# EAGLE board final - test (EAGLE 9.4.2)
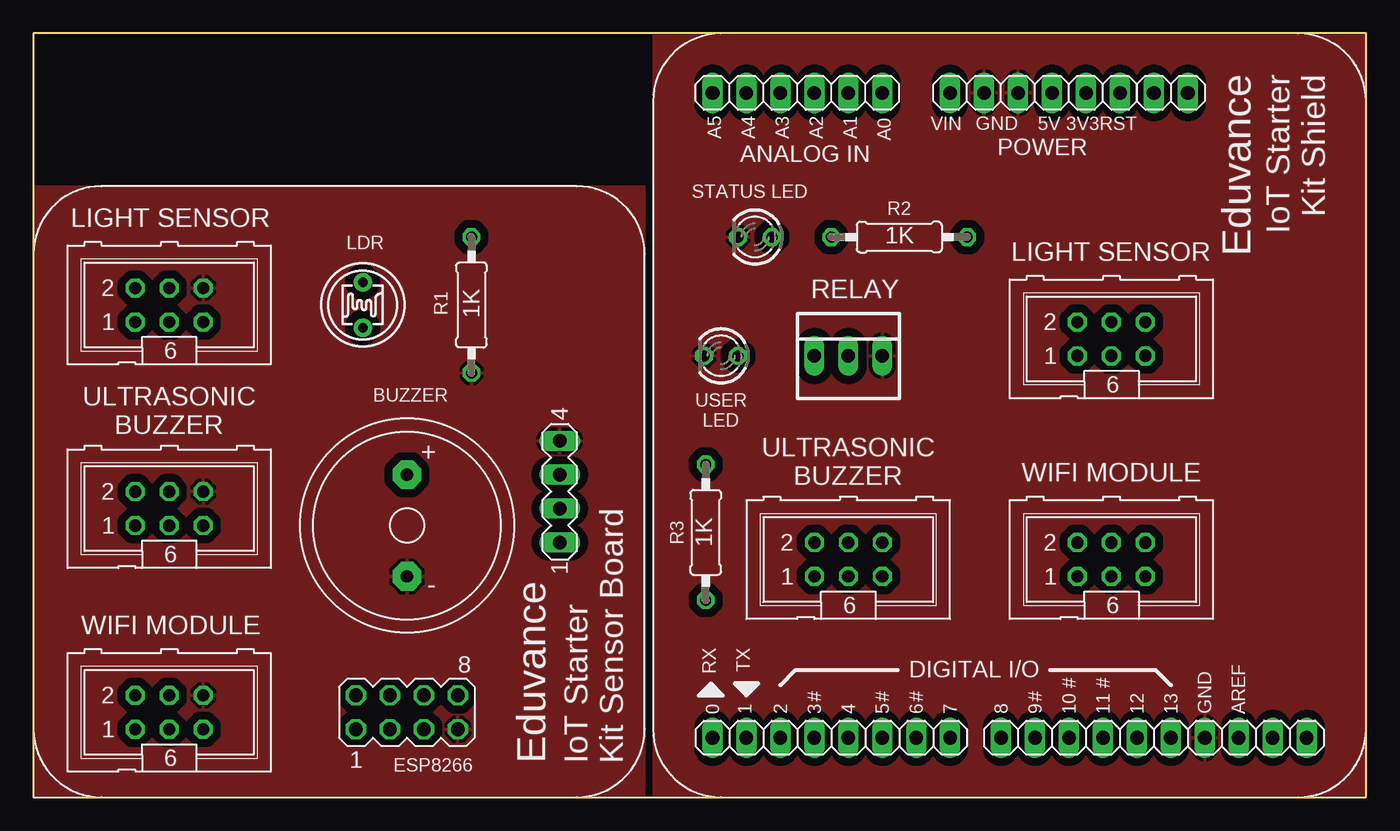
[diagram p0: board, top side]
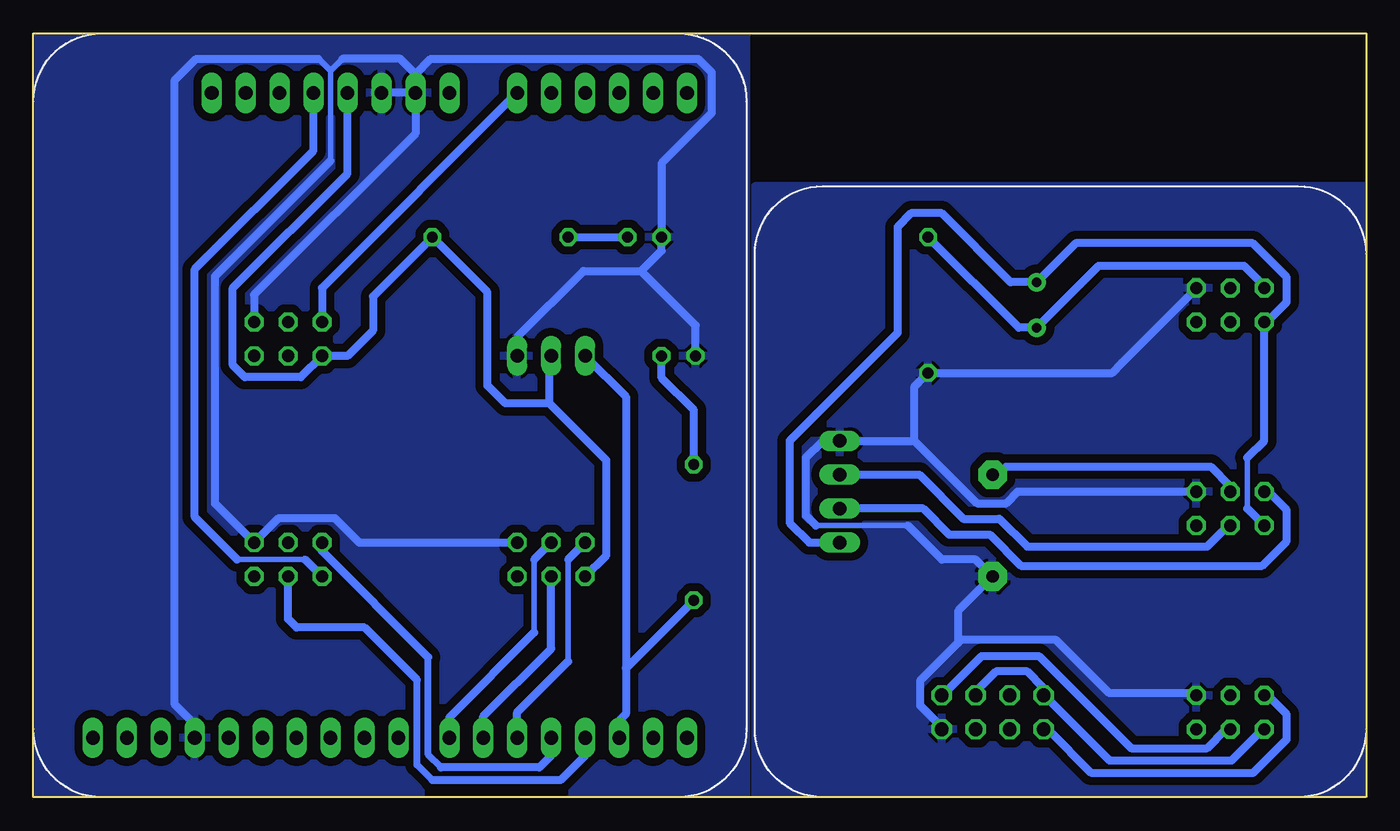
[diagram p1: board, bottom side, seen from below]

Size 99.69 x 57.15 mm. Coordinates in mm from the lower left corner, seen from the top.
Outline: 0,0 99.69,0 99.69,57.15 0,57.15 0,0
Copper layers (1*16): Top 0.035mm / dielectric 1.5mm / Bottom 0.035mm
Design rules "default *": minimum track width 20mil, minimum drill 0.35mm, track to track 24mil, track to pad 24mil, pad to pad 24mil, via to via 24mil, smd to smd 24mil, copper to edge 1mil, drill to drill 6mil, minimum pad ring 10mil, minimum via ring 8mil, stop-mask expansion 4mil, vias tented up to drill 0mil, thermal gap 10mil
tKeepout: area 0,0 to 45.7,45.7; area 46.4,0 to 99.7,57.1

## Footprints (pad centres in the part's own frame; a part is rotated, then mirrored left to right if it is on the bottom)
1X02 = drill 1.016 long: 1 -1.27,0; 2 1.27,0
1X06 = drill 1.016 long: 1 -6.35,0; 2 -3.81,0; 3 -1.27,0; 4 1.27,0; 5 3.81,0; 6 6.35,0
F/QMB = drill 0.914 pad 2.159 octagon: + 3.81,0; - -3.81,0
MA04-2 = drill 1.016 octagon: 1 -3.81,-1.27; 2 -3.81,1.27; 3 -1.27,-1.27; 4 -1.27,1.27; 5 1.27,-1.27; 6 1.27,1.27; 7 3.81,-1.27; 8 3.81,1.27
1X08 = drill 1.016 long: 1 -8.89,0; 2 -6.35,0; 3 -3.81,0; 4 -1.27,0; 5 1.27,0; 6 3.81,0; 7 6.35,0; 8 8.89,0
T0-46-A10XX = drill 0.7 pad 1.4: 1 -1.7,0; 2 1.7,0
LED3MM = drill 0.813 octagon: A -1.27,0; K 1.27,0
ML6 = drill 0.914 octagon: 1 -2.54,-1.27; 2 -2.54,1.27; 3 0,-1.27; 4 0,1.27; 5 2.54,-1.27; 6 2.54,1.27
0207/10 = drill 0.813 octagon: 1 -5.08,0; 2 5.08,0
22-23-2031 = drill 1 long: 1 -2.54,0; 2 0,0; 3 2.54,0
MA04-1 = drill 1.016 long: 1 -3.81,0; 2 -1.27,0; 3 1.27,0; 4 3.81,0

## Placement (x,y rotation side)
_  [1X02]  93.98,4.45 0 top
__  [1X02]  85.09,52.7 0 top
AD  [1X06]  57.15,52.7 180 top
BUZZER  BUZZER  [F/QMB]  27.94,20.32 90 top
ESP8266  [MA04-2]  27.94,6.35 0 top
IOH  [1X08]  81.28,4.45 0 top
IOL  [1X08]  59.69,4.45 0 top
LDR  [T0-46-A10XX]  24.64,36.83 270 top
LED  USER LED  [LED3MM]  51.44,33.02 180 top
LIGHT_SENSOR  LIGHT SENSOR  [ML6]  10.16,36.83 0 top
LIGHT_SENSOR2  LIGHT SENSOR  [ML6]  80.64,34.29 0 top
POWER  [1X06]  74.93,52.7 180 top
R1  1K  [0207/10]  32.77,36.83 90 top
R2  1K  [0207/10]  64.77,41.91 180 top
R3  1K  [0207/10]  50.29,19.81 270 top
RELAY  22-23-2031  [22-23-2031]  60.96,33.02 0 top
STATUS_LED  STATUS LED  [LED3MM]  53.98,41.91 180 top
ULTRASONIC_BUZZER  ULTRASONIC BUZZER  [ML6]  10.16,21.59 0 top
ULTRASONIC_BUZZER2  ULTRASONIC BUZZER  [ML6]  60.96,17.78 0 top
ULTRASONIC_SENSOR  ULTRASONIC SENSOR  [MA04-1]  39.37,22.86 90 top
WIFI_MODULE  WIFI MODULE  [ML6]  10.16,6.35 0 top
WIFI_MODULE2  WIFI MODULE  [ML6]  80.64,17.78 0 top

## Library data of the parts
_ __ AD IOH IOL POWER = pinhead
BUZZER = buzzer; OC_FARNELL: unknown; OC_NEWARK: unknown
ESP8266 ULTRASONIC_SENSOR = con-lstb; OC_FARNELL: unknown; OC_NEWARK: unknown
LDR = photo-elements
LED STATUS_LED = led
LIGHT_SENSOR LIGHT_SENSOR2 ULTRASONIC_BUZZER ULTRASONIC_BUZZER2 WIFI_MODULE WIFI_MODULE2 = con-harting-ml; OC_FARNELL: unknown; OC_NEWARK: unknown
R1-R3 = rcl; SPICEPREFIX: R
RELAY = con-molex; MF: MOLEX; MPN: 22-23-2031; OC_FARNELL: 1462950; OC_NEWARK: 30C0862

## Nets
3V3: ESP8266.2 ESP8266.6 WIFI_MODULE.1
5V: LDR.1 LIGHT_SENSOR.1 ULTRASONIC_BUZZER.1 ULTRASONIC_SENSOR.1
BUZ: BUZZER.+ ULTRASONIC_BUZZER.4
ECHO: ULTRASONIC_BUZZER.3 ULTRASONIC_SENSOR.3
GND: BUZZER.- ESP8266.7 LIGHT_SENSOR.6 R1.1 ULTRASONIC_BUZZER.6 ULTRASONIC_SENSOR.4 WIFI_MODULE.6
GND2: IOH.7 LED.K POWER.4 POWER.5 RELAY.3 STATUS_LED.K
N$1: POWER.3 RELAY.2
N$3: AD.1
N$4: IOL.6
N$5: IOL.7
N$6: IOL.8
N$7: POWER.2
N$8: IOL.4
N$9: IOL.5
N$10: STATUS_LED.A
N$11: IOL.3 R3.2 RELAY.1
RX: ESP8266.1 WIFI_MODULE.2
S$1: LED.A R3.1
SG: LDR.2 LIGHT_SENSOR.2 R1.2
TRIG: ULTRASONIC_BUZZER.2 ULTRASONIC_SENSOR.2
TX: ESP8266.8 WIFI_MODULE.3

## Tracks (layer width: path | path; a pad name or v marks a point on that pad's centre or on a via)
3V3
  Bottom 0.61: WIFI_MODULE.1 7.77,5.03 10.06,2.74 19.2,2.74 23.77,7.32 ESP8266.2 24.13,8.18 25.35,9.4 27.69,9.4 29.21,7.87 ESP8266.6
5V
  Bottom 0.406: 8.89,21.59 8.89,25.4
  Bottom 0.61: ULTRASONIC_SENSOR.1 41.66,19.05 43.13,20.52 43.13,26.67 35.05,34.75 35.05,42.67 34.04,43.69 31.75,43.69 26.59,38.53 LDR.1 21.71,41.45 8.48,41.45 5.94,38.91 5.94,37.03 7.32,35.66 LIGHT_SENSOR.1 7.62,26.67 8.89,25.4 | ULTRASONIC_BUZZER.1 8.89,21.59
BUZ
  Bottom 0.61: ULTRASONIC_BUZZER.4 10.16,23.27 11.63,24.74 26.92,24.74 27.53,24.13 BUZZER.+
ECHO
  Bottom 0.61: ULTRASONIC_BUZZER.3 10.52,20.12 11.89,18.75 25.35,18.75 27.43,20.83 30.12,20.83 33.43,24.13 ULTRASONIC_SENSOR.3
GND
  Bottom 0.406: 34.29,20.32 41.17,20.32
  Bottom 0.61: WIFI_MODULE.6 12.8,7.77 19.2,7.77 23.19,11.76 30.3,11.76 30.48,11.58 | ESP8266.7 32,5.49 33.38,6.86 33.38,8.69 30.56,11.51 30.48,11.58 | 18.26,32.49 12.8,37.95 LIGHT_SENSOR.6 | ULTRASONIC_BUZZER.6 26.06,22.86 26.92,22 29.11,22 33.78,26.67 | 34.29,20.32 31.75,17.78 29.21,17.78 BUZZER.- 30.48,13.97 30.48,11.58 | 41.17,20.32 41.91,21.06 41.91,25.4 40.64,26.67 ULTRASONIC_SENSOR.4 33.78,26.67 | 18.29,32.51 18.26,32.49 | 18.26,32.49 19,31.75 R1.1 33.78,30.73 33.78,26.67
  pour Bottom: 0,45.72 45.72,45.72 45.72,0 0,0
  pour Top: 0,45.72 45.72,45.72 45.72,0 0,0
GND2
  Bottom 0.406: 77.47,54.36 78.36,55.24 | 77.47,47.62 77.47,54.36 | 76.58,55.24 77.47,54.36
  Bottom 0.61: 63.5,19.05 75.31,19.05 77.15,20.89 81.34,20.89 83.19,19.05 86.11,21.97 86.11,38.99 77.47,47.62 | 83.19,35.56 83.19,37.59 71.12,49.66 POWER.5 | POWER.5 71.12,53.02 | 78.36,55.24 87.5,55.24 89.15,53.59 89.15,6.99 87.63,5.46 IOH.7 | POWER.5 POWER.4 | 71.12,54.1 69.98,55.24 49.97,55.24 48.96,54.23 48.96,51.18 52.7,47.43 STATUS_LED.K 52.7,40.89 54.23,39.37 | POWER.5 71.12,54.1 | 71.12,54.1 72.26,55.24 76.58,55.24 | RELAY.3 63.5,34.42 58.55,39.37 54.23,39.37 | LED.K 50.16,35.31 54.23,39.37
  pour Bottom: 46.35,57.15 99.69,57.15 99.69,0 46.35,0
  pour Top: 46.35,57.15 46.35,0 99.69,0 99.69,57.15
N$1
  Bottom 0.61: POWER.3 76.2,46.67 84.77,38.1 84.77,32.32 83.88,31.43 79.69,31.43 78.11,33.02 76.2,33.02 74.3,34.92 74.3,37.47 69.85,41.91 65.72,37.78 65.72,30.8 64.39,29.46 61.09,29.46 | 58.42,16.51 56.83,18.1 56.83,25.21 61.09,29.46 | 61.09,29.46 61.09,32.89 RELAY.2
N$3
  Bottom 0.61: 78.11,35.56 78.11,38.1 AD.1
N$4
  Bottom 0.406: 59.69,10.16 59.69,17.78
  Bottom 0.61: IOL.6 63.5,6.35 59.69,10.16 | 59.69,17.78 58.42,19.05
N$5
  Bottom 0.61: 60.96,16.51 60.96,11.11 66.04,6.03 IOL.7
N$6
  Bottom 0.406: 62.23,17.78 62.23,12.32
  Bottom 0.61: 60.96,19.05 62.23,17.78 | 62.23,12.32 68.58,5.97 IOL.8
N$7
  Bottom 0.406: 79.38,17.78 84.45,17.78
  Bottom 0.61: 78.11,16.51 79.38,17.78 | 84.45,17.78 87.63,20.95 87.63,39.5 78.74,48.39 POWER.2
N$8
  Bottom 0.508: 69.85,1.27 70.99,2.41 70.99,8.76
  Bottom 0.61: 80.64,16.51 80.64,13.34 80.01,12.7 74.93,12.7 70.99,8.76 | 69.85,1.27 60.26,1.27 58.42,3.11 IOL.4
N$9
  Bottom 0.508: 70.17,10.48 70.17,3.17 69.22,2.22
  Bottom 0.61: 78.11,19.05 78.11,18.41 70.17,10.48 | 69.22,2.22 61.85,2.22 60.96,3.11 IOL.5
N$10
  Bottom 0.61: 59.69,41.91 STATUS_LED.A
N$11
  Bottom 0.61: RELAY.1 55.37,29.97 55.37,9.65 | IOL.3 55.88,5.71 55.37,6.22 55.37,9.65 | R3.2 55.37,9.65
RX
  Bottom 0.61: WIFI_MODULE.2 7.37,7.62 5.94,6.2 5.94,4.32 8.43,1.83 20.57,1.83 23.77,5.03 ESP8266.1
S$1
  Bottom 0.61: R3.1 50.29,28.96 52.7,31.37 LED.A
SG
  Bottom 0.61: LIGHT_SENSOR.2 7.77,38.41 9.14,39.78 19.99,39.78 LDR.2 25.99,35.13 R1.2
TRIG
  Bottom 0.61: ULTRASONIC_BUZZER.2 7.32,22.86 5.94,21.49 5.94,19.15 7.77,17.32 25.81,17.32 28.14,19.66 31.19,19.66 33.12,21.59 ULTRASONIC_SENSOR.2
TX
  Bottom 0.61: WIFI_MODULE.3 10.52,5.03 11.89,3.66 17.58,3.66 24.49,10.57 28.75,10.57 31.55,7.77 ESP8266.8

## Text on the board
tPlace: LIGHT SENSOR | LIGHT SENSOR | RELAY | ULTRASONIC / BUZZER | + | WIFI MODULE | ULTRASONIC / BUZZER | - | WIFI MODULE | 0 | 1 | 2 | 3 | 4 | 5 | 6 | 7 | 8 | 9 | 10 | 11 | 12 | 13
tNames: Eduvance | IoT Starter / Kit Shield | A5 | A4 | A3 | A2 | A1 | A0 | VIN | GND | 5V | 3V3 | RST | ANALOG IN | USER / LED | RX | TX | DIGITAL I/O | # | # | # | # | # | # | GND | AREF | Eduvance | IoT Starter / Kit Sensor Board